# EAGLE board Leiterplatte_LED_Gruppe_fertig (EAGLE 9.7.0)
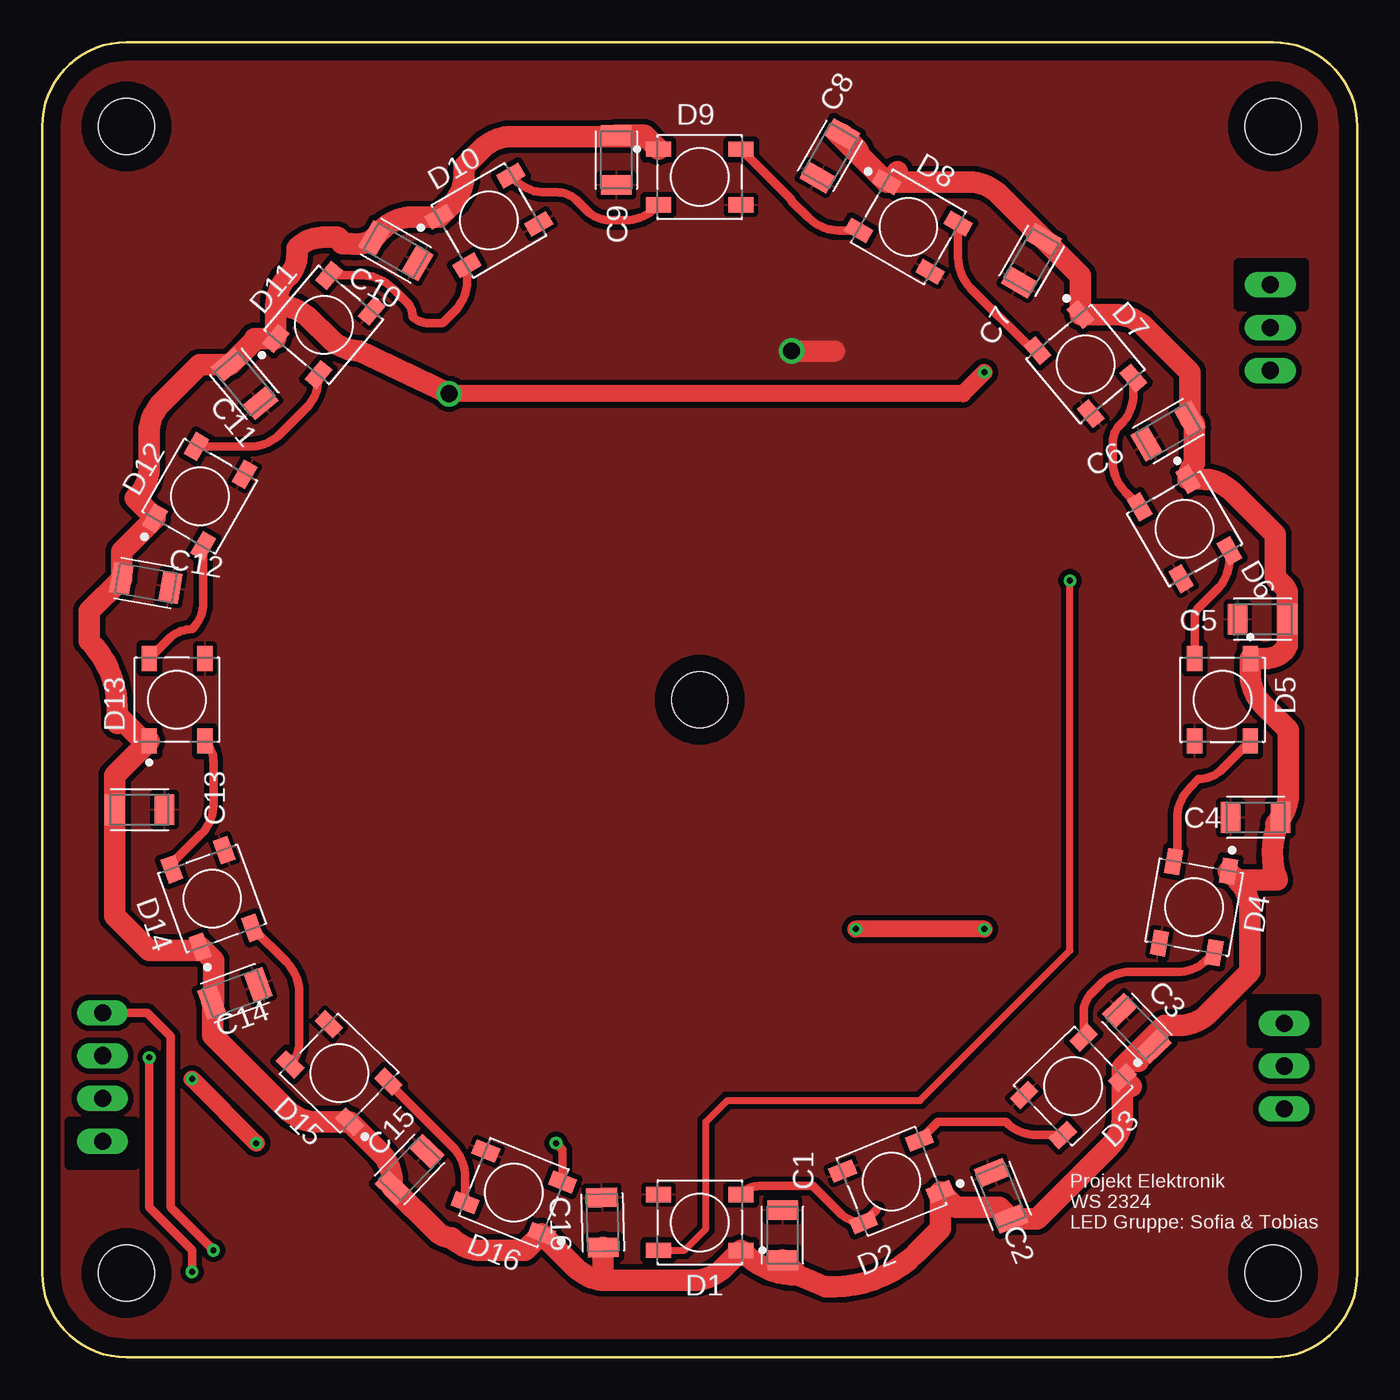
[diagram p0: board, top side]
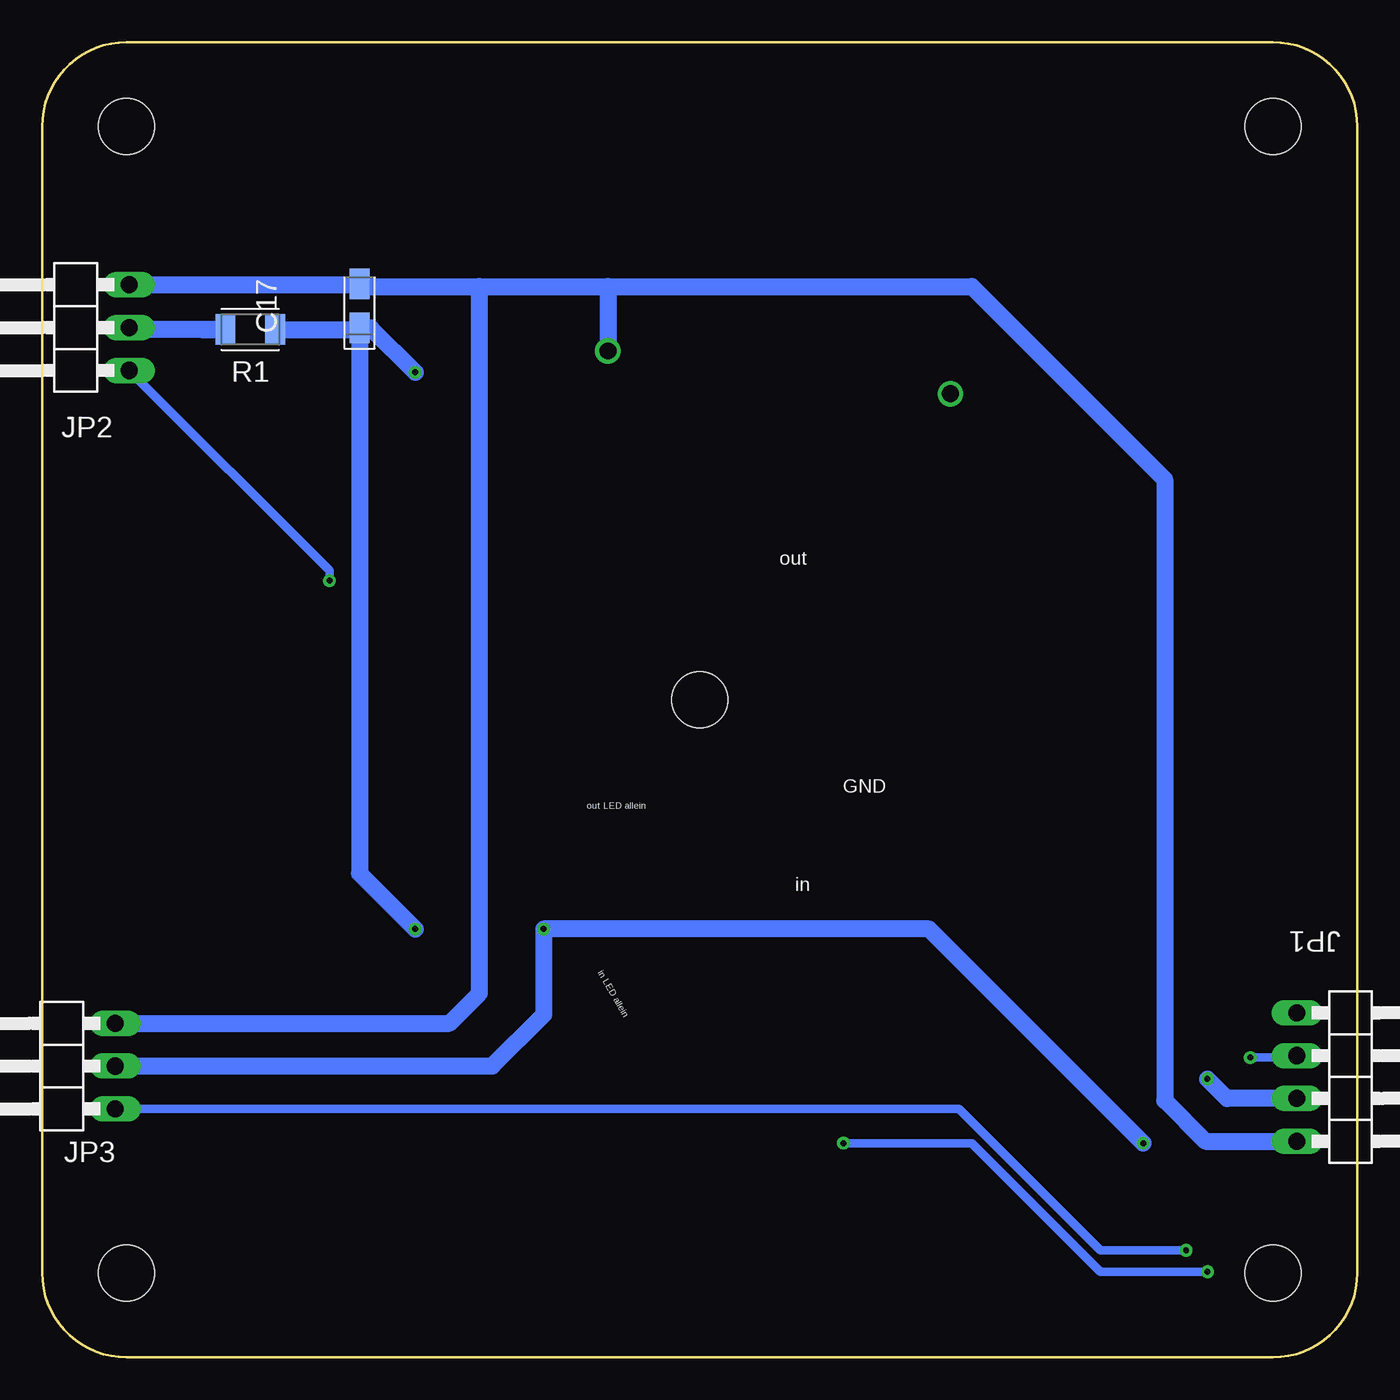
[diagram p1: board, bottom side, seen from below]

Size 78 x 78 mm. Coordinates in mm from the lower left corner, seen from the top.
Outline: 0,5 0,73 arc-90 5,78 73,78 arc-90 78,73 78,5 arc-90 73,0 5,0 arc-90 0,5
Copper layers (1*16): Top / Bottom
Stack-up Default Layer Stack: Top User Defined 0.035mm / Dielectric-1 User Defined 1.5mm / Bottom User Defined 0.035mm
Design rules: minimum copper width 6mil, minimum drill size 0.35mm, copper clearance wire_polygon to wire_polygon 6mil, copper clearance wire_polygon to pad_smd 6mil, copper clearance wire_polygon to via 6mil, copper clearance pad_smd to pad_smd 6mil, copper clearance pad_smd to via 6mil, copper clearance via to via 6mil, copper clearance smd to pad (same net) 6mil, copper clearance smd to via (same net) 6mil, copper clearance smd to smd (same net) 6mil, dimension clearance 40mil, restrict clearance 0mil, drill distance 6mil, keepout clearance 0mil
Holes 3.3 mm at 73,73 5,73 5,5 73,5 39,39
tRestrict: area 71.8,18.7 to 75.6,21.2; area 1.7,11.4 to 5.5,14; area 71,62.4 to 74.8,64.9

## Footprints (pad centres in the part's own frame; a part is rotated, then mirrored left to right if it is on the bottom)
CAPC3216X135 = smd 1.165 x 1.815: 1 -1.475,0; 2 1.475,0
CAPMP3216X180N = smd 1.796 x 1.189: 1 -1.31,0; 2 1.31,0
WS2812B = smd 1.5 x 0.9: 1 -2.45,1.65; 2 -2.45,-1.65; 3 2.45,-1.65; 4 2.45,1.65
1X04/90 = drill 1.016 long: 1 -3.81,-3.81; 2 -1.27,-3.81; 3 1.27,-3.81; 4 3.81,-3.81
1X03/90 = drill 1.016 long: 1 -2.54,-3.81; 2 0,-3.81; 3 2.54,-3.81
RESC3216X70 = smd 1.165 x 1.815: 1 -1.475,0; 2 1.475,0

## Placement (x,y rotation side)
C1  [CAPC3216X135]  43.91,7.25 270 top
C2  [CAPC3216X135]  56.88,9.59 292 top
C3  [CAPC3216X135]  64.93,19.51 314 top
C4  [CAPC3216X135]  71.96,32.02 0 top
C5  [CAPC3216X135]  72.38,43.77 0 top
C6  [CAPC3216X135]  66.79,54.93 30 top
C7  [CAPC3216X135]  58.67,65.02 60 top
C8  [CAPC3216X135]  46.72,71.26 60 top
C9  [CAPC3216X135]  34.05,71.01 90 top
C10  [CAPC3216X135]  20.98,65.63 150 top
C11  [CAPC3216X135]  12,57.74 310 top
C12  [CAPC3216X135]  6.16,45.92 350 top
C13  [CAPC3216X135]  5.78,32.49 180 top
C14  [CAPC3216X135]  11.43,21.59 20 top
C15  [CAPC3216X135]  21.78,11.15 46 top
C16  [CAPC3216X135]  33.23,8 91.6 top
C17  [CAPMP3216X180N]  59.18,62.36 90 bottom
D1  WS2812B  [WS2812B]  39,8 180 top
D2  WS2812B  [WS2812B]  50.37,10.43 202 top
D3  WS2812B  [WS2812B]  61.15,16.08 224 top
D4  WS2812B  [WS2812B]  68.31,26.7 260 top
D5  WS2812B  [WS2812B]  70,39 270 top
D6  WS2812B  [WS2812B]  67.75,49.13 300 top
D7  WS2812B  [WS2812B]  61.88,58.9 310 top
D8  WS2812B  [WS2812B]  51.38,67.04 330 top
D9  WS2812B  [WS2812B]  39,70 0 top
D10  WS2812B  [WS2812B]  26.49,67.43 30 top
D11  WS2812B  [WS2812B]  16.7,61.23 50 top
D12  WS2812B  [WS2812B]  9.35,51.07 60 top
D13  WS2812B  [WS2812B]  8,39 90 top
D14  WS2812B  [WS2812B]  10.08,27.21 110 top
D15  WS2812B  [WS2812B]  17.62,16.86 136 top
D16  WS2812B  [WS2812B]  27.97,9.78 158 top
JP1  PINHD-1X4/90  [1X04/90]  -0.23,16.62 270 bottom
JP2  PINHD-1X3/90  [1X03/90]  76.65,61.07 90 bottom
JP3  PINHD-1X3/90  [1X03/90]  77.47,17.27 90 bottom
R1  [RESC3216X70]  65.66,60.96 180 bottom

## Library data of the parts
C1-C17 = Capacitor; CATEGORY: Capacitor
D1-D16 = LED; CATEGORY: LED; COLOR: RGB; DESCRIPTION: LED integrated light source; MANUFACTURER: Worldsemi; MPN: WS2812B; OPERATING_TEMP: -25 ℃ to +80℃(TJ); PART_STATUS: Active; SUB_CATEGORY: RGB
JP1 = Connector; CATEGORY: Headers; DESCRIPTION: Header, Right Angle, 4 Position; MANUFACTURER: Generic; MPN: Generic; OPERATING_TEMPERATURE: Generic; PART_STATUS: Active; PITCH: 0.100" (2.54mm); ROHS_COMPLIANCE: Generic; SERIES: Generic; SUB-CATEGORY: Headers, Male Pins; TYPE: Board to Board or Cable, Unshrouded, Through Hole, Right Angle
JP2 JP3 = Connector; CATEGORY: Headers; DESCRIPTION: Header, Right Angle, 3 Position; MANUFACTURER: Generic; MPN: Generic; OPERATING_TEMPERATURE: Generic; PART_STATUS: Active; PITCH: 0.100" (2.54mm); ROHS_COMPLIANCE: Generic; SERIES: Generic; SUB-CATEGORY: Headers, Male Pins; TYPE: Board to Board or Cable, Unshrouded, Through Hole, Right Angle
R1 = Resistor; CATEGORY: Resistor; SUB-CATEGORY: Fixed

## Nets
+5V: C1.2 C2.2 C3.2 C4.2 C5.2 C6.2 C7.2 C8.2 C9.2 C10.2 C11.1 C12.1 C13.2 C14.1 C15.1 C16.1 C17.1 D1.1 D2.1 D3.1 D4.1 D5.1 D6.1 D7.1 D8.1 D9.1 D10.1 D11.1 D12.1 D13.1 D14.1 D15.1 D16.1 JP1.3 JP3.2 R1.1
DATA_END: JP1.1 JP3.1
DATA_IN: D1.4 JP2.1
DATA_OUT: D16.2 JP1.2
GND: C1.1 C2.1 C3.1 C4.1 C5.1 C6.1 C7.1 C8.1 C9.1 C10.1 C11.2 C12.2 C13.1 C14.2 C15.2 C16.2 C17.2 D1.3 D2.3 D3.3 D4.3 D5.3 D6.3 D7.3 D8.3 D9.3 D10.3 D11.3 D12.3 D13.3 D14.3 D15.3 D16.3 JP1.4 JP2.3 JP3.3
N$1: D14.2 D15.4
N$2: D15.2 D16.4
N$4: JP2.2 R1.2
N$5: D2.2 D3.4
N$6: D3.2 D4.4
N$7: D4.2 D5.4
N$8: D5.2 D6.4
N$9: D6.2 D7.4
N$10: D7.2 D8.4
N$11: D8.2 D9.4
N$12: D9.2 D10.4
N$13: D10.2 D11.4
N$14: D11.2 D12.4
N$15: D12.2 D13.4
N$16: D13.2 D14.4
N$19: D1.2 D2.4

## Tracks (layer width: path | path; a pad name or v marks a point on that pad's centre or on a via)
+5V  (via drill 0.35, 1)
  Top 0.508: D3.1 65.01,17.54 65.88,18.42 arc-45 C3.2
  Top 1.016: v55.88,25.4 v48.26,25.4 | v8.89,16.51 v12.7,12.7 | v55.88,58.42 54.61,57.15 v24.13,57.15
  Top 1.27: 44.81,4.87 46.46,4.19 46.98,4.19 arc45 51.84,6.21 53.26,7.62 D2.1 54.19,8.89 56.76,8.89 C2.2 59.02,8.22 63.31,12.52 arc45 64.06,14.31 D3.1 | 44.81,4.87 arc-45 41.59,6.21 D1.1 40.42,5.32 arc-45 38.62,4.57 33.43,4.57 | 33.43,4.57 arc-45 31.64,5.32 D16.1 28.64,6.35 26.07,6.35 arc-45 24.27,7.09 arc-45 23.39,7.46 C15.1 20.76,10.39 arc45 20.02,12.19 D15.1 16.29,13.97 arc-45 14.49,14.71 10.11,19.1 10.11,21.02 | 33.43,4.57 arc-45 33.27,4.96 C16.1 | C1.2 44.81,4.87 | D3.1 64.58,16.07 | D4.1 70.88,28.3 | 70.88,28.3 arc-45 71.63,26.51 71.63,22.86 69.2,20.43 arc-45 67.4,19.68 66.55,19.68 64.71,17.84 | 64.71,17.84 64.06,17.2 D3.1 | 70.88,28.3 73.24,28.3 arc-45 C4.2 73.44,31.9 73.17,31.64 arc45 73.91,33.43 73.91,37.21 72.39,38.73 arc-45 71.65,40.53 D5.1 72.55,41.45 arc45 73.66,41.91 arc45 73.86,42.38 C5.2 73.86,45.25 arc45 73.66,45.72 73.13,46.25 73.13,48.79 70.58,51.34 arc45 68.79,52.08 D6.1 arc-45 68.34,53 68.34,55.39 C6.2 68.06,58.43 65.4,61.09 arc45 63.6,61.84 D7.1 61.57,64.14 C7.2 59.41,66.32 56.78,68.95 arc45 54.99,69.69 D8.1 | 47.11,72.66 48.45,71.31 | 48.45,71.31 D8.1 | D8.1 50.71,70.33 | C8.2 48.3,71.7 arc-45 48.45,71.31 | 35.81,72.39 27.85,72.39 arc45 26.05,71.65 25.02,70.61 25.02,70.16 arc-45 24.27,68.36 D10.1 21.95,67.63 arc45 20.16,66.89 C10.2 arc-45 18.29,66.04 17.78,66.04 arc45 17.69,66.26 17.53,66.42 16.65,66.42 arc45 15.11,65.79 15.11,65.36 arc-45 14.61,64.14 arc45 13.86,62.34 14.08,62.34 | 14.08,62.34 arc-45 15.88,61.59 17.04,60.43 arc45 18.83,59.69 v24.13,57.15 | 4.45,37.58 4.45,38.1 | 4.45,38.1 4.45,38.49 arc45 2.8,42.49 2.8,44.26 C12.1 4.71,47.78 D12.1 5.52,50.95 5.61,51.04 arc45 6.35,52.84 6.35,54.83 arc-45 7.09,56.62 9.34,58.87 C11.1 11.15,58.87 12.7,60.41
  Top 1.27: 4.45,38.1 6,36.55 D13.1 4.3,34.5 C13.2 4.3,26.18 6.35,24.13 9.15,24.13 D14.1 10.16,23.55 10.16,21.07 10.11,21.02 | 10.11,21.02 C14.1 | 12.6,60.41 12.7,60.41 | 12.7,60.41 D11.1 13.86,62.12 14.08,62.34 | 64.71,17.84 65.01,17.54 | D9.1 35.81,72.39 | 35.81,72.39 35.72,72.48 C9.2
  Bottom 1.016: R1.1 59.27,60.96 C17.1 | C17.1 59.18,28.7 v55.88,25.4 | JP3.2 51.31,17.27 48.26,20.32 v48.26,25.4 25.4,25.4 v12.7,12.7 | JP1.3 7.73,15.35 v8.89,16.51 | C17.1 58.51,61.05 v55.88,58.42
DATA_END  (via drill 0.35)
  Top 0.508: v10.16,6.35 7.62,8.89 7.62,19.05 6.24,20.43 JP1.1
  Bottom 0.508: JP3.1 23.62,14.73 15.24,6.35 v10.16,6.35
DATA_IN  (via drill 0.35)
  Top 0.406: v60.96,46.06 60.96,24.13 52.07,15.24 40.64,15.24 39.37,13.97 39.37,7.62 38.1,6.35 D1.4
  Bottom 0.508: JP2.1 60.96,46.65 v60.96,46.06
DATA_OUT  (via drill 0.35)
  Top 0.508: D16.2 30.86,12.32 v30.48,12.7 | v6.35,17.78 6.35,8.89 8.89,6.35 v8.89,5.08
  Bottom 0.508: v30.48,12.7 22.86,12.7 15.24,5.08 v8.89,5.08 | JP1.2 3.7,17.78 v6.35,17.78
GND  (via drill 1)
  Top 1.27: 46.99,59.69 v44.45,59.69
  Bottom 1.016: JP2.3 59.23,63.61 C17.2 59.02,63.5 52.07,63.5 | 52.07,63.5 44.45,63.5 | 44.45,63.5 22.86,63.5 11.43,52.07 11.43,15.24 9,12.81 JP1.4 | JP3.3 53.85,19.81 52.07,21.59 52.07,63.5 | 44.45,63.5 v44.45,59.69
  pour Top (isolate 0.305, rank 4): -0.46,77.27 -0.46,1 74.59,1 77.54,3.95 77.54,74.35 74.62,77.27
N$1
  Top 0.508: D15.4 arc45 15.24,18.65 15.24,21.65 arc45 14.5,23.44 D14.2
N$2
  Top 0.508: D16.4 25.08,10.7 arc45 24.34,12.49 20.56,16.27 arc-45 D15.2
N$4
  Bottom 1.016: 68.58,60.96 R1.2 72.73,60.96 JP2.2
N$5
  Top 0.508: D3.4 58.98,13.19 arc-45 57.19,13.94 57.15,13.97 53.11,13.97 D2.2
N$6
  Top 0.508: D4.4 69.11,23.6 arc-45 67.32,22.86 64.55,22.86 arc45 62.76,22.12 62.23,21.59 arc45 61.77,20.47 D3.2
N$7
  Top 0.508: D5.4 69.96,34.86 arc-45 68.58,34.29 68.05,33.76 arc45 67.31,31.97 67.31,29.88 arc-45 D4.2
N$8
  Top 0.508: D6.4 70.41,47.33 arc-45 69.66,45.53 68.58,44.45 arc45 68.35,43.9 D5.2
N$9
  Top 0.508: D7.4 64.72,57.13 arc-45 63.98,55.34 63.88,55.24 arc45 63.5,54.33 63.5,53.12 arc45 64.24,51.33 65.1,50.47 D6.2
N$10
  Top 0.508: D8.4 54.32,65.22 arc45 55.07,63.42 58.59,59.91 arc45 D7.2
N$11
  Top 0.508: D9.4 44.4,68.7 arc-45 44.45,68.58 45.45,67.58 arc45 47.25,66.83 D8.2
N$12
  Top 0.508: D10.4 28.04,69.83 arc45 29.84,69.09 30.52,69.09 arc-45 31.75,68.58 32.35,67.98 arc45 33.66,67.44 34.59,67.44 arc45 36.38,68.18 D9.2
N$13
  Top 0.508: D11.4 18.98,64.17 arc-45 20.78,63.42 21.61,62.59 arc-45 21.97,61.72 arc45 22.89,61.34 23.75,61.34 24.45,62.05 arc45 25.2,63.84 D10.2
N$14
  Top 0.508: D12.4 12.32,54.02 arc45 14.12,54.76 15.64,56.28 arc45 16.39,58.08 D11.2
N$15
  Top 0.508: D13.4 7.51,42.61 arc-45 8.89,43.18 arc45 9.55,44.78 D12.2
N$16
  Top 0.508: D14.4 arc-45 7.93,29.52 9.42,31.01 arc45 10.16,32.8 10.16,35.32 arc45 D13.2
N$19
  Top 0.508: 49.47,8.74 D2.4 arc-45 47.31,8.57 45.72,10.16 42.51,10.16 arc45 41.48,9.73 arc45 D1.2

## Text on the board
tNames: Projekt Elektronik / WS 2324 / LED Gruppe: Sofia & Tobias
bNames: out | GND | out LED allein | in | in LED allein